# Altium PCB BUCK_Module_2596_ADJ.PcbDoc
Units mil, origin at the board's own origin, x right, y up, seen from the top; angles counter-clockwise.
Board outline 2362.2 x 1181.1 mil, 2 copper layers (Top Layer, Bottom Layer); 17 components, 6 nets, 135 pads, 21 vias.
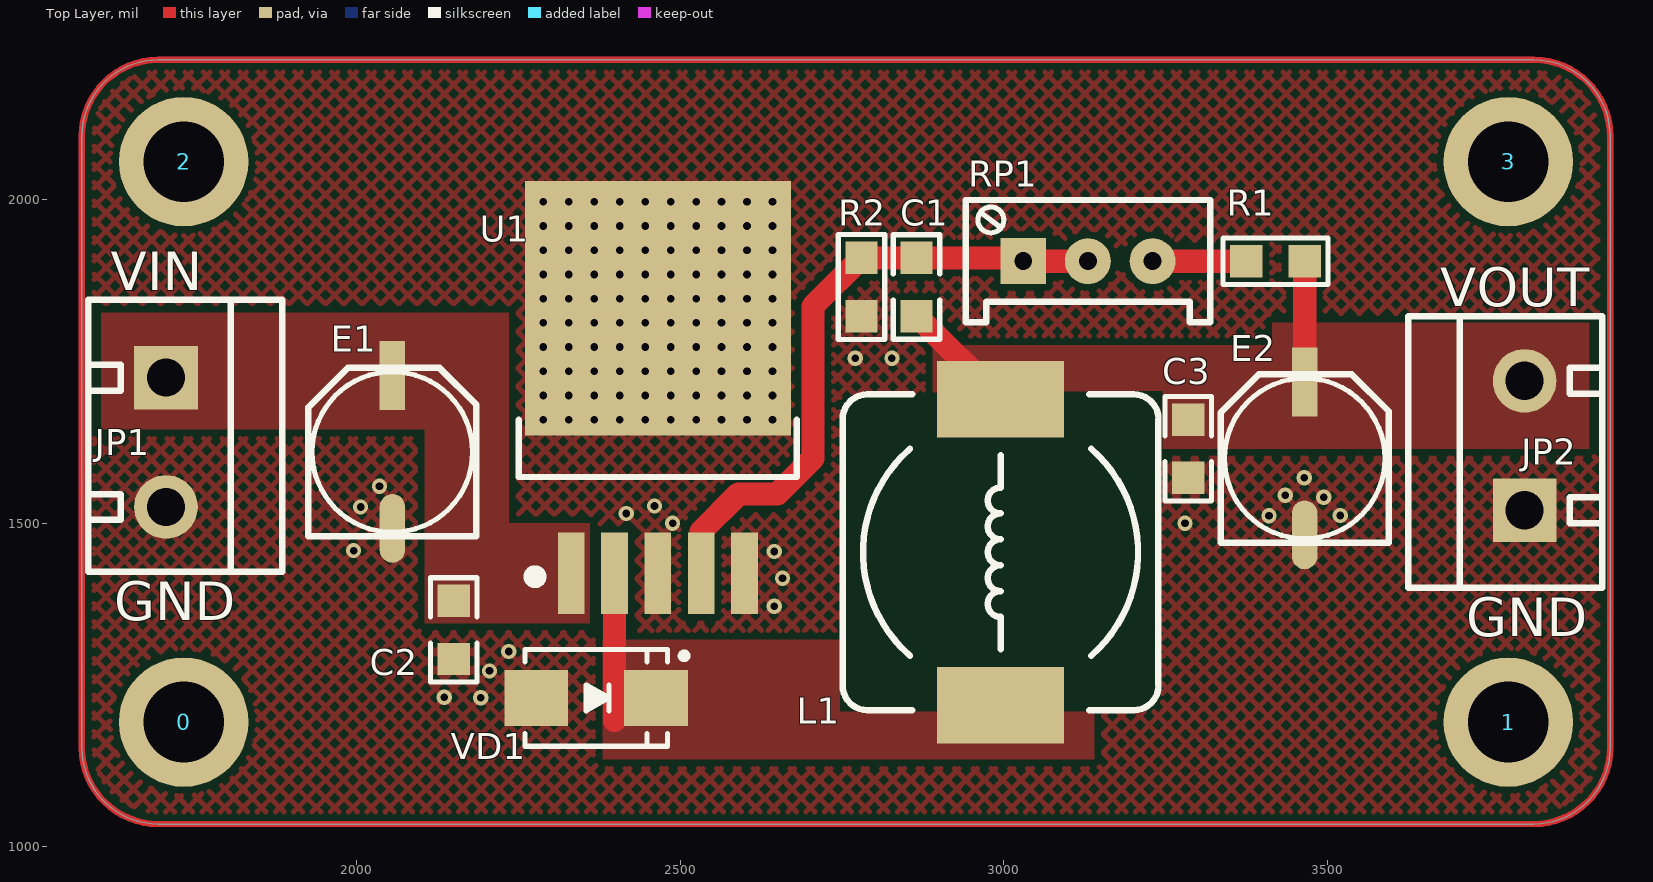
[diagram p0: Top Layer view]
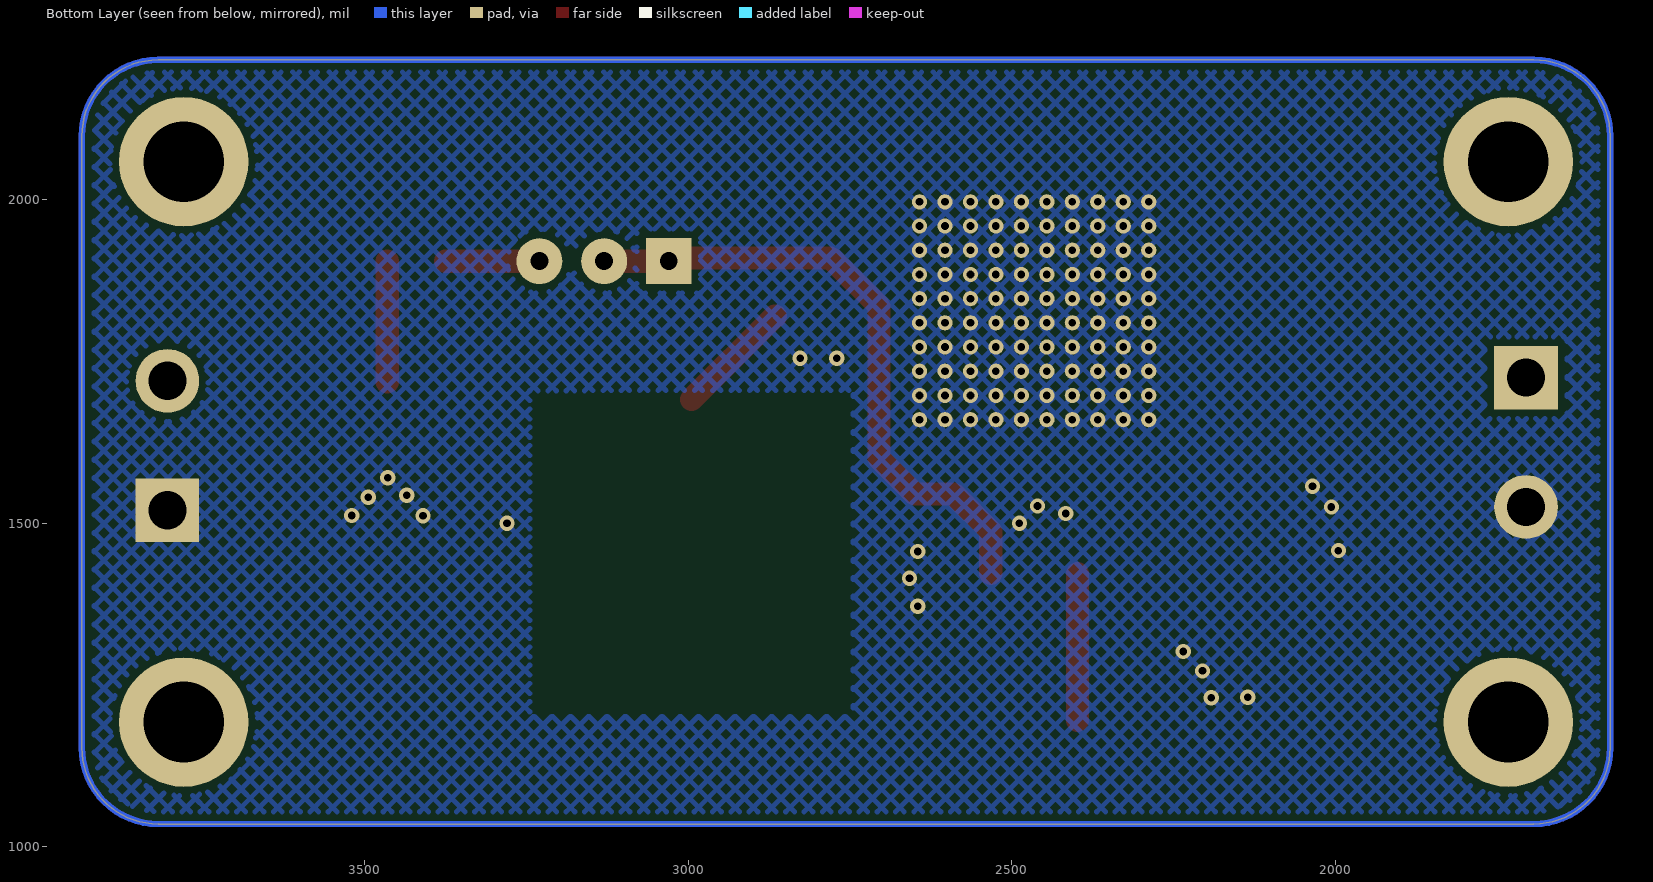
[diagram p1: Bottom Layer view, seen from below]

## Layer stack, top to bottom
Top Solder: solder mask 0.4, Solder Resist, Dk 3.5
Top Layer: signal copper 1.4
Dielectric 1: dielectric 12.6, FR-4, Dk 4.8
Bottom Layer: signal copper 1.4
Bottom Solder: solder mask 0.4, Solder Resist, Dk 3.5

## Board outline
1575,1153.11 ccw(c1693.11,1153.11) 1693.11,1035 3819.09,1035 ccw(c3819.09,1153.11) 3937.2,1153.11 3937.2,2097.99 ccw(c3819.09,2097.99) 3819.09,2216.1 1693.11,2216.1 ccw(c1693.11,2097.99) 1575,2097.99

## Design rules (kind name [scope] priority, off if disabled: settings)
Clearance [All] p1: gap=10 ignorepadtopadclearanceinfootprint=FALSE except(0: Arc-Hole Track-Hole SMDPad-Hole THPad-Hole Via-Hole Fill-Hole Poly-Hole Region-Hole Text-Hole)
PlaneConnect [All] p1: planeconnectstyle=Direct reliefexpansion=20 reliefentries=4 reliefconductorwidth=10 reliefairgap=10
PolygonConnect [All] p1: connectstyle=Direct reliefconductorwidth=10 reliefentries=4 polygonreliefangle="90 Angle" airgapwidth=10
RoutingVias [All] p1: holewidth=28 width=50 viastyle="Through Hole" minholewidth=28 minwidth=50 maxholewidth=28 maxwidth=50
SolderMaskExpansion [All] p1: expansion=4
Width [All] p1: maxlimit=108 minlimit=10 preferedwidth=36 bottomlayer_prefwidth=10 minimp=50.000000 maximp=50.000000 favimp=50.000000
29 further rules are at their usual default settings.

## Components (designator, comment, footprint, x,y, rotation, side; value= is the part's Value field where it differs from the comment)
0 "M3" "M3 125X200" 1732.48,1192.48 r0 top
1 "M3" "M3 125X200" 3779.72,1192.48 r0 top
2 "M3" "M3 125X200" 1732.48,2058.62 r0 top
3 "M3" "M3 125X200" 3779.72,2058.62 r0 top
C1 "104" "C 0805" 2865,1865 r90 top
C2 "104" "C 0805" 2150,1335 r90 top
C3 "104" "C 0805" 3285,1615 r90 top
E1 "220uF/16V" "CM D(6.3*5.4)" 2055,1610 r90 top
E2 "220uF/16V" "CM D(6.3*7.7)" 3465,1600 r90 top
JP1 "HDR-1X2" KF301-2P 1705,1725 r270 top
JP2 "HDR-1X2" KF301-2P 3805,1520 r90 top
L1 "33uH" CDRH127 2995,1455 r90 top
R1 "1K" "R 0805" 3420,1905 r0 top
R2 "1K" "R 0805" 2780,1865 r90 top
RP1 "10K" 3296W 3130,1905 r0 top
U1 "LM2596" LM2596 2465.32,1421.81 r0 top
VD1 "SS54" SMB 2370,1230 r0 top

## Footprints (in the part's own frame and the unit in brackets; to place one, negate y for a bottom-side part, rotate by r counter-clockwise, add the part's x,y. Pads: shape width x height; smd on the part's side, far side on the other; paste and mask are expansions set on the pad)
3296W [mm] "Precise Multi-Winding Adjustable Resistor"
  rect 1.8x1.8 hole 0.7: 1(-2.54,0)
  round 1.8 hole 0.7: 2(2.54,0) ADJ(0,0)
  silkscreen extent -4.8,-2.4 4.8,2.4, body extent -4.75,-2.4 4.75,2.4, height 11.52
"C 0805" [mil] "无极性贴片电容"
  rect 50x50 smd: 1(-45,0) 2(45,0)
  silkscreen extent -81,-36 81,36, body extent -39,-24 39,24, height 20
CDRH127 [mm] "12*12*8mm（长宽高）"
  rect 3x5 smd: 1(-6,0) 2(6,0)
  silkscreen extent -6.2,-6.2 6.2,6.2, body extent -6,-6 6,6, height 7.8
"CM D(6.3*5.4)" [mm] "贴片电解电容，直径6.3mm，高5.4mm"
  rect 2.7x1 smd: 1(3,0)
  oval 2.7x1 smd: 2(-3,0)
  silkscreen extent -3.3,-3.3 3.3,3.3, body extent -3.5,-3.3 3.5,3.3, height 5.4
"CM D(6.3*7.7)" [mm] "贴片电解电容，直径6.3mm，高7.7mm"
  rect 2.7x1 smd: 1(3,0)
  oval 2.7x1 smd: 2(-3,0)
  silkscreen extent -3.3,-3.3 3.3,3.3, body extent -3.5,-3.3 3.5,3.3, height 7.7
KF301-2P [mm] "可拼接端子/6A"
  rect 2.5x2.5 hole 1.5: 1(0,0)
  round 2.5 hole 1.5: 2(5.08,0)
  silkscreen extent -3.05,-3.05 7.62,4.57, body extent -2.87,-3 7.63,4.6, height 10.05
LM2596 [mm] "3A降压芯片"
  rect 1.05x3.2 smd: 1(-3.4,0.01) 2(-1.7,0.01) 3(0,0.01) 4(1.7,0.01) 5(3.4,0.01)
  round 0.6 hole 0.3: 3(-4.5,6.05) 3(-4.5,7) 3(-4.5,7.95) 3(-4.5,8.9) 3(-4.5,9.85) 3(-4.5,10.8) 3(-4.5,11.75) 3(-4.5,12.7) 3(-4.5,13.65) 3(-4.5,14.6) 3(-3.5,6.05) 3(-3.5,7) 3(-3.5,7.95) 3(-3.5,8.9) 3(-3.5,9.85) 3(-3.5,10.8) 3(-3.5,11.75) 3(-3.5,12.7) 3(-3.5,13.65) 3(-3.5,14.6) 3(-2.5,6.05) 3(-2.5,7) 3(-2.5,7.95) 3(-2.5,8.9) 3(-2.5,9.85) 3(-2.5,10.8) 3(-2.5,11.75) 3(-2.5,12.7) 3(-2.5,13.65) 3(-2.5,14.6) 3(-1.5,6.05) 3(-1.5,7) 3(-1.5,7.95) 3(-1.5,8.9) 3(-1.5,9.85) 3(-1.5,10.8) 3(-1.5,11.75) 3(-1.5,12.7) 3(-1.5,13.65) 3(-1.5,14.6) 3(-0.5,6.05) 3(-0.5,7) 3(-0.5,7.95) 3(-0.5,8.9) 3(-0.5,9.85) 3(-0.5,10.8) 3(-0.5,11.75) 3(-0.5,12.7) 3(-0.5,13.65) 3(-0.5,14.6) 3(0.5,6.05) 3(0.5,7) 3(0.5,7.95) 3(0.5,8.9) 3(0.5,9.85) 3(0.5,10.8) 3(0.5,11.75) 3(0.5,12.7) 3(0.5,13.65) 3(0.5,14.6) 3(1.5,6.05) 3(1.5,7) 3(1.5,7.95) 3(1.5,8.9) 3(1.5,9.85) 3(1.5,10.8) 3(1.5,11.75) 3(1.5,12.7) 3(1.5,13.65) 3(1.5,14.6) 3(2.5,6.05) 3(2.5,7) 3(2.5,7.95) 3(2.5,8.9) 3(2.5,9.85) 3(2.5,10.8) 3(2.5,11.75) 3(2.5,12.7) 3(2.5,13.65) 3(2.5,14.6) 3(3.5,6.05) 3(3.5,7) 3(3.5,7.95) 3(3.5,8.9) 3(3.5,9.85) 3(3.5,10.8) 3(3.5,11.75) 3(3.5,12.7) 3(3.5,13.65) 3(3.5,14.6) 3(4.5,6.05) 3(4.5,7) 3(4.5,7.95) 3(4.5,8.9) 3(4.5,9.85) 3(4.5,10.8) 3(4.5,11.75) 3(4.5,12.7) 3(4.5,13.65) 3(4.5,14.6)
  rect 10.45x10 smd: 3(0,10.424)
  silkscreen extent -5.46,-0.32 5.46,6.05, body extent -5,0 5,13.33, height 4.5
"M3 125X200" [mil] "M3螺丝孔，孔125Mil，焊盘200Mil"
  round 200 hole 125: 0(0,0)
"R 0805" [mil] "1/8W贴片电阻"
  rect 50x50 smd: 1(-45,0) 2(45,0)
  silkscreen extent -81,-36 81,36, body extent -39,-25 39,25, height 20
SMB [mm] "4.7*3.9*2.2mm(长宽高，不包括引脚）"
  rect 2.5x2.2 smd: 1(-2.35,0) 2(2.35,0)
  silkscreen extent -2.8,-1.9 3.58,1.9, body extent -2.63,-1.8 2.67,1.8, height 2.35

## Part data
0 1 2 3: "铜柱孔"
C1 C2 C3: library part C, "无极性贴片电容"
E1 E2: library part C-CM, "贴片电解电容"
JP1 JP2: library part "Header 2", "2P接插件", BOM名称=2P接, 学习资源=www.ooocke.
L1: library part L-CDRH, "功率屏蔽电感"
R1 R2: library part R, "贴片电阻"
RP1: library part RP-ID, "插件电位器", BOM名称=插件, 学习资源=www.ooocke.
VD1: library part SS24, "肖特基二极管"

## Via types
v1: diameter 23.62, hole 11.81, Top Layer to Bottom Layer, tented both sides, 21 vias

## Nets (pads, with @x,y where several pads share a name; then routed paths per layer and width w, separated by ;. In a path a pad name is that pad's centre, name@x,y a point inside that pad or via, vN(x,y) a via of type N, cw(c..) or ccw(c..) an arc to the next point about the centre after c; other vN are vias at no path point)
GND: C2.1 C3.1 E1.2 E2.2 JP1.2 JP2.1 R2.1 U1.3 U1.5 VD1.1
  other v1: 2191.67,1230 2135,1230.83 2205,1271.62 2235,1301.62 2645,1371.37 2657.94,1415 2645,1456.22 1995,1457.6 2488.08,1500 3280,1500.04 3410,1511.47 3520,1511.82 2416.52,1515 2005.83,1525 2460,1526.62 3494.6,1540 3435,1543.03 2035,1557.1 3464.6,1570 2770.49,1755 2827.05,1755
NetC1_2: C1.2 R2.2 RP1.1 RP1.ADJ U1.4 | length 977.6
  Top Layer w36: U1.4 2532.24,1487.24 2590,1545 2650,1545 2705,1600 2705,1835 R2.2 C1.2 3025,1910 RP1.1 RP1.ADJ
NetL1_1: L1.1 U1.2 VD1.2 | length 227.2
  Top Layer w36: 2398.39,1195 U1.2
NetR1_1: R1.1 RP1.2 | length 145
  Top Layer w36: RP1.2 R1.1
VIN: C2.2 E1.1 JP1.1 U1.1
VOUT: C1.1 C3.2 E2.1 JP2.2 L1.2 R1.2 | length 370.2
  Top Layer w36: C1.1 2866.22,1820 L1.2 ; E2.1 R1.2
pads on no net: 0.0 1.0 2.0 3.0
copper on no net: | length 13767.7
  Top Layer w10: 1575,1153.11 ccw(c1693.11,1153.11) 1693.11,1035 3819.09,1035 ccw(c3819.09,1153.11) 3937.2,1153.11 3937.2,2097.99 ccw(c3819.09,2097.99) 3819.09,2216.1 1693.11,2216.1 ccw(c1693.11,2097.99) 1575,2097.99 1575,1153.11
  Bottom Layer w10: 1575,1153.11 ccw(c1693.11,1153.11) 1693.11,1035 3819.09,1035 ccw(c3819.09,1153.11) 3937.2,1153.11 3937.2,2097.99 ccw(c3819.09,2097.99) 3819.09,2216.1 1693.11,2216.1 ccw(c1693.11,2097.99) 1575,2097.99 1575,1153.11

## Polygon pours and split planes (outlines as drawn)
GND on Top Layer "GND_L01_P006" (hatched 45Degree grid 20 track 8, remove dead copper, pour order 6): 1510,2360 1510,995 4035,995 4035,2370
VOUT on Top Layer "VOUT_L01_P004" (solid, remove dead copper, pour order 4): 2890,1775 2890,1615 3905,1615 3905,1809.61 3415,1809.61 3415,1775
NetL1_1 on Top Layer "NETL1_1_L01_P002" (solid, remove dead copper, pour order 2): 2380,1320 2380,1135 3140,1135 3140,1320
VIN on Top Layer "VIN_L01_P000" (solid, remove dead copper, pour order 0): 1605,1825 1605,1645 2105,1645 2105,1345 2360,1345 2360,1500 2235,1500 2235,1825
GND on Bottom Layer "GND_L02_P008" (hatched 45Degree grid 20 track 8, remove dead copper, pour order 8): 1500,2310 1500,995 4085,995 4085,2310

## Other copper
Top Layer:
  pour cut-out: 2746.52,1700 2746.52,1208.53 3245.33,1208.53 3245.33,1705
Bottom Layer:
  pour cut-out: 2745,1705 2745,1201.25 3245,1201.25 3245,1704.75

## Silkscreen, mask and mechanical layers (free items; w line width, h text height)
Top Overlay:
  text "VIN" at 1620,1860 h60
  text "VOUT" at 3675,1835 h60
  text "GND" at 1625,1350 h60
  text "GND" at 3715,1325 h60
Mechanical 1:
  the board outline again, w10